# EAGLE board PIC16 Training Board Breakout PCB Editor (EAGLE 9.7.0)
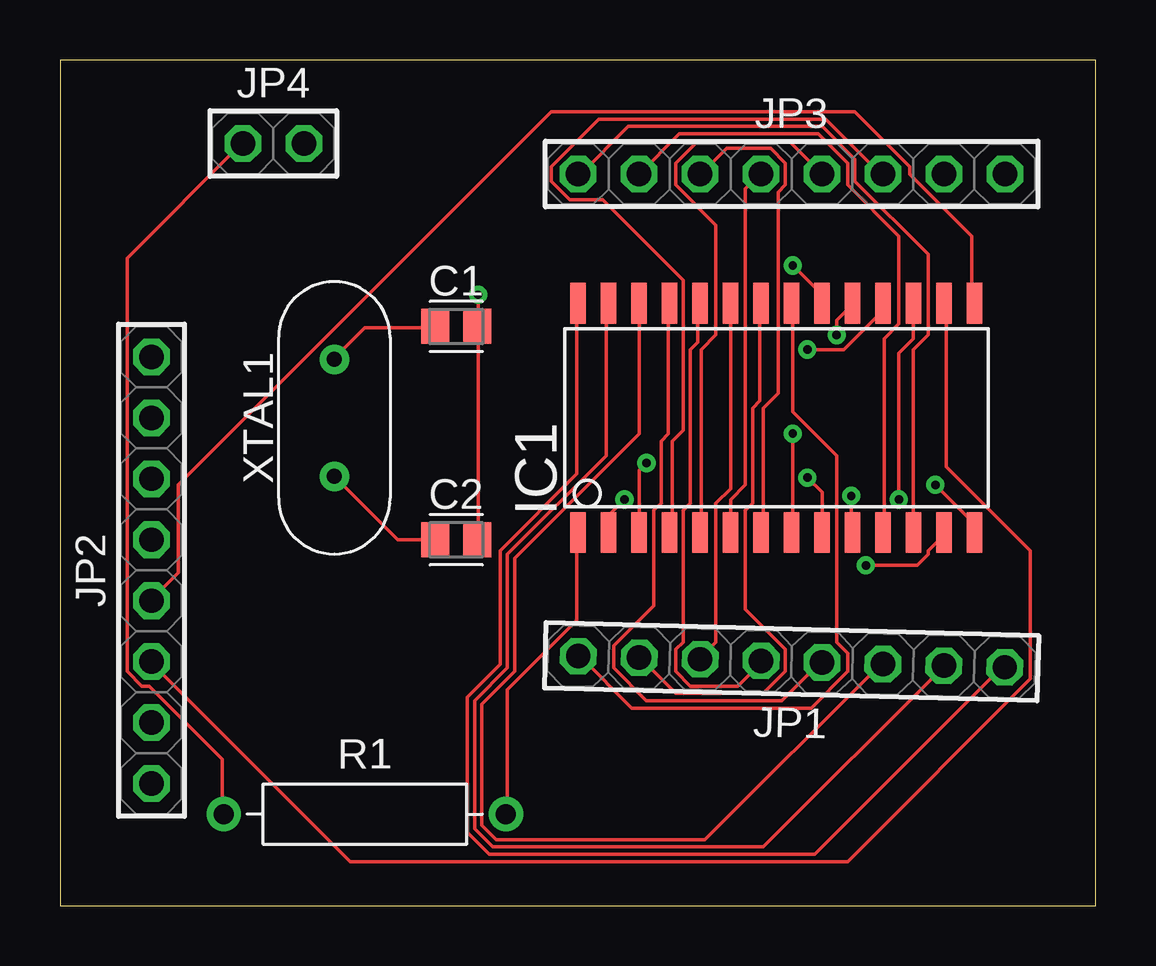
[diagram p0: board, top side]
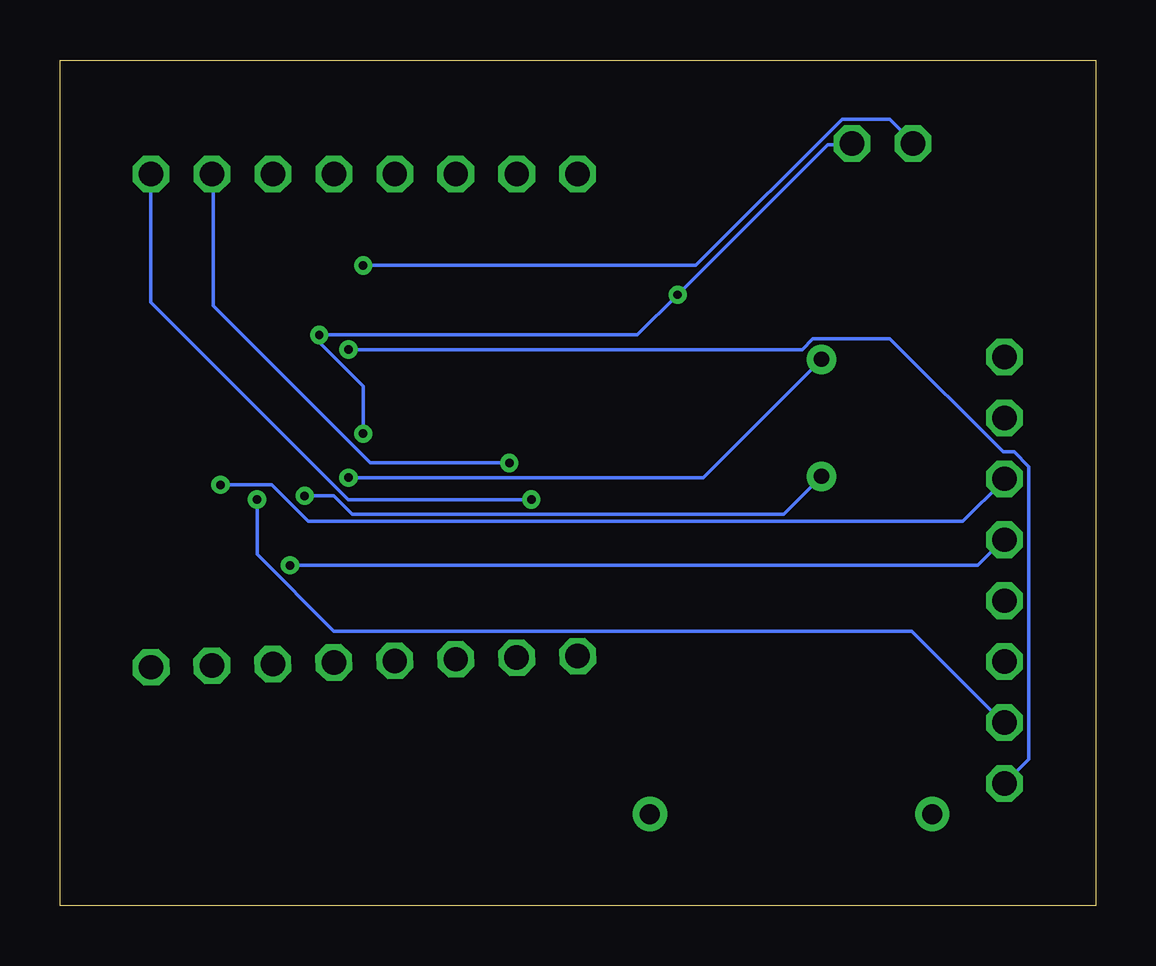
[diagram p1: board, bottom side, seen from below]

Size 43.16 x 35.23 mm. Coordinates in mm from the lower left corner, seen from the top.
Outline: 0,0 43.16,0 43.16,35.23 0,35.23 0,0
Copper layers (1*16): Top / Bottom
Stack-up Default Layer Stack: Top SilkScreen Epoxy Ink / Top SolderMask SR:Green 0.0254mm Dk 4.3 / Top Surface Finish Lead-Free 0.02mm / Top CuFoil:007 0.035mm / Dielectric-1 User Defined 1.5mm / Bottom CuFoil:007 0.035mm / Bottom Surface Finish Lead-Free 0.02mm / Bottom SolderMask SR:Green 0.0254mm Dk 4.3 / Bottom SilkScreen Epoxy Ink
Design rules: minimum copper width 6mil, minimum drill size 0.35mm, copper clearance wire_polygon to wire_polygon 6mil, copper clearance wire_polygon to pad_smd 6mil, copper clearance wire_polygon to via 6mil, copper clearance pad_smd to pad_smd 6mil, copper clearance pad_smd to via 6mil, copper clearance via to via 6mil, copper clearance smd to pad (same net) 6mil, copper clearance smd to via (same net) 6mil, copper clearance smd to smd (same net) 6mil, dimension clearance 40mil, via restrict clearance 0mil, restrict clearance 0mil, drill distance 6mil, keepout clearance 0mil

## Footprints (pad centres in the part's own frame; a part is rotated, then mirrored left to right if it is on the bottom)
CAPC2012X110 = smd 1.165 x 1.465: 1 -0.875,0; 2 0.875,0
SO28W = smd 0.65 x 1.7: 1 -7.62,-4.78; 2 -6.35,-4.78; 3 -5.08,-4.78; 4 -3.81,-4.78; 5 -2.54,-4.78; 6 -1.27,-4.78; 7 0,-4.78; 8 1.27,-4.78; 9 2.54,-4.78; 10 3.81,-4.78; 11 5.08,-4.78; 12 6.35,-4.78; 13 7.62,-4.78; 14 8.89,-4.78; 15 8.89,4.78; 16 7.62,4.78; 17 6.35,4.78; 18 5.08,4.78; 19 3.81,4.78; 20 2.54,4.78; 21 1.27,4.78; 22 0,4.78; 23 -1.27,4.78; 24 -2.54,4.78; 25 -3.81,4.78; 26 -5.08,4.78; 27 -6.35,4.78; 28 -7.62,4.78
1X08 = drill 1.016 octagon: 1 -8.89,0; 2 -6.35,0; 3 -3.81,0; 4 -1.27,0; 5 1.27,0; 6 3.81,0; 7 6.35,0; 8 8.89,0
1X02 = drill 1.016 octagon: 1 -1.27,0; 2 1.27,0
RESAD1176W63L850D250B = drill 0.83 pad 1.43: 1 -5.88,0; 2 5.88,0
XTALRR488W43L1135T465H1346B = drill 0.63 pad 1.23: 1 -2.44,0; 2 2.44,0

## Placement (x,y rotation side)
C1  33pF  [CAPC2012X110]  16.51,24.13 0 top
C2  33pF  [CAPC2012X110]  16.51,15.24 0 top
IC1  PIC16F870SO  [SO28W]  29.21,20.32 0 top
JP1  PINHD-1X8  [1X08]  30.48,10.16 178.5 top
JP2  PINHD-1X8  [1X08]  3.81,13.97 90 top
JP3  PINHD-1X8  [1X08]  30.48,30.48 0 top
JP4  PINHD-1X2  [1X02]  8.89,31.75 0 top
R1  10k  [RESAD1176W63L850D250B]  12.7,3.81 0 top
XTAL1  20MHz  [XTALRR488W43L1135T465H1346B]  11.43,20.32 90 top

## Library data of the parts
C1 C2 = Capacitor; CATEGORY: Capacitor; PACKAGE_SIZE: 0805; PACKAGE_TYPE: Surface Mount; SUBCATEGORY: Ceramic Capacitors; TYPE: MLCC
IC1 = microchip; MF: MICROCHIP; MPN: PIC16F870-I/SO; OC_FARNELL: 9760946; OC_NEWARK: 61K3457
JP1-JP3 = Connector; CATEGORY: Connectors; DESCRIPTION: Header-Straight-8 Position; PACKAGE_TYPE: Through Hole; PITCH: 0.100" (2.54mm); SUBCATEGORY: Headers; TYPE: Male Pins
JP4 = Connector; CATEGORY: Connectors; DESCRIPTION: Header-Straight-2 Position; PACKAGE_TYPE: Through Hole; PITCH: 0.100" (2.54mm); SUBCATEGORY: Headers; TYPE: Male Pins
R1 = Tinkercad; CATEGORY: Resistor; SUB-CATEGORY: Fixed
XTAL1 = Frequency-Source; CATEGORY: Crystals; PACKAGE_SIZE: HC-49/US; PACKAGE_TYPE: Through Hole

## Nets
GND: C1.2 C2.2 IC1.8 IC1.19 JP4.2
N$1: C1.1 IC1.9 XTAL1.2
N$2: C2.1 IC1.10 XTAL1.1
N$4: IC1.1 R1.2
N$5: IC1.28 JP1.1
N$6: IC1.27 JP1.2
N$7: IC1.26 JP1.3
N$8: IC1.25 JP1.4
N$9: IC1.24 JP1.5
N$10: IC1.23 JP1.6
N$11: IC1.22 JP1.7
N$12: IC1.21 JP1.8
N$13: IC1.18 JP2.1
N$14: IC1.17 JP2.2
N$15: IC1.16 JP2.3
N$16: IC1.15 JP2.4
N$17: IC1.13 JP2.5
N$18: IC1.14 JP2.6
N$19: IC1.2 JP3.8
N$20: IC1.3 JP3.7
N$21: IC1.4 JP3.6
N$22: IC1.5 JP3.5
N$23: IC1.6 JP3.4
N$24: IC1.7 JP3.3
N$25: IC1.11 JP3.2
N$26: IC1.12 JP3.1
VCC: IC1.20 JP4.1 R1.1

## Tracks (layer width: path | path; a pad name or v marks a point on that pad's centre or on a via)
GND  (via drill 0.35)
  Top 0.152: C2.2 17.42,15.24 17.42,24.08 C1.2 17.42,24.23 v17.42,25.45 | v30.53,19.66 30.53,15.54 IC1.8 | v32.36,23.77 32.36,24.38 32.97,24.99 IC1.19
  Bottom 0.152: v30.53,19.66 30.53,21.64 32.36,23.47 v32.36,23.77 19.1,23.77 v17.42,25.45 11.18,31.7 10.26,31.7 JP4.2
N$1  (via drill 0.35)
  Top 0.152: C1.1 15.6,24.08 12.7,24.08 11.48,22.86 XTAL1.2 | IC1.9 31.75,17.22 v31.14,17.83
  Bottom 0.152: v31.14,17.83 16.36,17.83 11.48,22.71 XTAL1.2
N$2  (via drill 0.35)
  Top 0.152: C2.1 14.07,15.24 11.48,17.83 XTAL1.1 | v32.97,17.07 32.97,15.54 IC1.10
  Bottom 0.152: v32.97,17.07 31.75,17.07 30.99,16.31 13,16.31 11.48,17.83 XTAL1.1
N$4
  Top 0.152: IC1.1 21.54,15.39 21.54,11.89 18.64,8.99 18.64,3.81 R1.2
N$5
  Top 0.152: IC1.28 21.54,24.99 21.54,17.98 18.34,14.78 18.34,10.06 16.97,8.69 16.97,3.05 17.88,2.13 31.44,2.13 39.22,9.91 JP1.1
N$6
  Top 0.152: IC1.27 22.76,24.99 22.76,18.75 18.64,14.63 18.64,9.91 17.27,8.53 17.27,3.2 18.03,2.44 29.31,2.44 36.78,9.91 JP1.2
N$7
  Top 0.152: IC1.26 24.13,19.66 18.95,14.48 18.95,9.75 17.58,8.38 17.58,3.35 18.19,2.74 26.87,2.74 34.19,10.06 JP1.3
N$8
  Top 0.152: IC1.25 25.35,24.99 25.35,19.66 25.04,19.36 25.04,16.76 24.74,16.46 24.74,12.5 23.06,10.82 23.06,9.91 24.44,8.53 30.07,8.53 31.6,10.06 JP1.4
N$9
  Top 0.152: IC1.24 26.57,24.99 26.57,23.47 26.26,23.17 26.26,16.76 25.96,16.46 25.96,10.97 25.65,10.67 25.65,9.75 26.26,9.14 28.25,9.14 29.16,10.06 JP1.5
N$10
  Top 0.152: IC1.23 27.94,17.37 27.33,16.76 27.33,10.97 26.72,10.36 JP1.6
N$11
  Top 0.152: IC1.22 29.16,24.99 29.16,21.03 28.85,20.73 28.85,16.76 28.55,16.46 28.55,12.34 30.23,10.67 30.23,9.75 29.31,8.84 25.65,8.84 24.28,10.21 JP1.7
N$12
  Top 0.152: IC1.21 30.53,24.99 30.53,20.57 32.36,18.75 32.36,10.97 32.82,10.52 32.82,9.75 31.29,8.23 23.82,8.23 21.69,10.36 JP1.8
N$13  (via drill 0.35)
  Top 0.152: v31.14,23.17 32.66,23.17 34.19,24.69 34.19,24.99 IC1.18
  Bottom 0.152: v31.14,23.17 12.24,23.17 11.79,23.62 8.58,23.62 3.86,18.9 3.4,18.9 2.79,18.29 2.79,6.1 JP2.1
N$14  (via drill 0.35)
  Top 0.152: IC1.17 35.56,23.62 34.95,23.01 v34.95,16.92
  Bottom 0.152: v34.95,16.92 34.95,14.63 31.75,11.43 7.67,11.43 3.86,7.62 JP2.2
N$15
  Top 0.152: IC1.16 36.93,24.99 36.93,18.29 40.44,14.78 40.44,9.45 32.82,1.83 12.09,1.83 3.86,10.06 JP2.3
N$16
  Top 0.152: IC1.15 38,25.15 38,27.89 35.41,30.48 35.41,30.79 33.12,33.07 20.47,33.07 4.93,17.53 4.93,13.87 3.86,12.8 JP2.4
N$17  (via drill 0.35)
  Top 0.152: v33.58,14.17 35.71,14.17 36.17,14.63 36.17,14.78 36.78,15.39 IC1.13
  Bottom 0.152: v33.58,14.17 4.93,14.17 3.86,15.24 JP2.5
N$18  (via drill 0.35)
  Top 0.152: v36.47,17.53 38,16 38,15.54 IC1.14
  Bottom 0.152: v36.47,17.53 34.34,17.53 32.82,16 5.54,16 3.86,17.68 JP2.6
N$19  (via drill 0.35)
  Top 0.152: v23.52,16.92 22.91,16.31 22.91,15.54 IC1.2
  Bottom 0.152: v23.52,16.92 31.14,16.92 39.37,25.15 JP3.8
N$20  (via drill 0.35)
  Top 0.152: IC1.3 24.13,18.14 v24.44,18.44
  Bottom 0.152: v24.44,18.44 30.23,18.44 36.78,24.99 36.78,30.48 JP3.7
N$21
  Top 0.152: IC1.4 25.5,15.54 25.5,19.36 25.96,19.81 25.96,26.06 22.61,29.41 21.23,29.41 20.47,30.18 20.47,30.79 22.45,32.77 31.9,32.77 34.19,30.48 JP3.6
N$22
  Top 0.152: JP3.5 30.38,31.85 26.57,31.85 25.65,30.94 25.65,30.02 27.33,28.35 27.33,23.77 26.72,23.17 26.72,15.54 IC1.5
N$23
  Top 0.152: IC1.6 27.94,16.92 28.55,17.53 28.55,29.87 29.16,30.48 JP3.4
N$24
  Top 0.152: IC1.7 29.31,15.54 29.31,20.73 29.92,21.34 29.92,29.72 30.23,30.02 30.23,30.94 29.62,31.55 27.79,31.55 26.72,30.48 JP3.3
N$25
  Top 0.152: JP3.2 25.81,32.16 31.6,32.16 32.82,30.94 32.82,30.02 34.95,27.89 34.95,24.23 34.34,23.62 34.34,15.54 IC1.11
N$26
  Top 0.152: IC1.12 35.56,23.17 36.17,23.77 36.17,27.13 33.12,30.18 33.12,31.09 31.75,32.46 23.67,32.46 21.69,30.48 JP3.1
VCC  (via drill 0.35)
  Top 0.152: IC1.20 31.75,25.45 v30.53,26.67 | R1.1 6.76,3.81 6.76,6.1 3.71,9.14 3.4,9.14 2.79,9.75 2.79,26.97 7.52,31.7 JP4.1
  Bottom 0.152: v30.53,26.67 16.66,26.67 10.57,32.77 8.58,32.77 7.67,31.85 JP4.1